# Altium PCB HUT BUI 2.PcbDoc
Units mil, origin at the board's own origin, x right, y up, seen from the top; angles counter-clockwise.
Board outline 6000 x 4000 mil, 2 copper layers (Top Layer, Bottom Layer); 7 components, 7 nets, 19 pads, 0 vias.
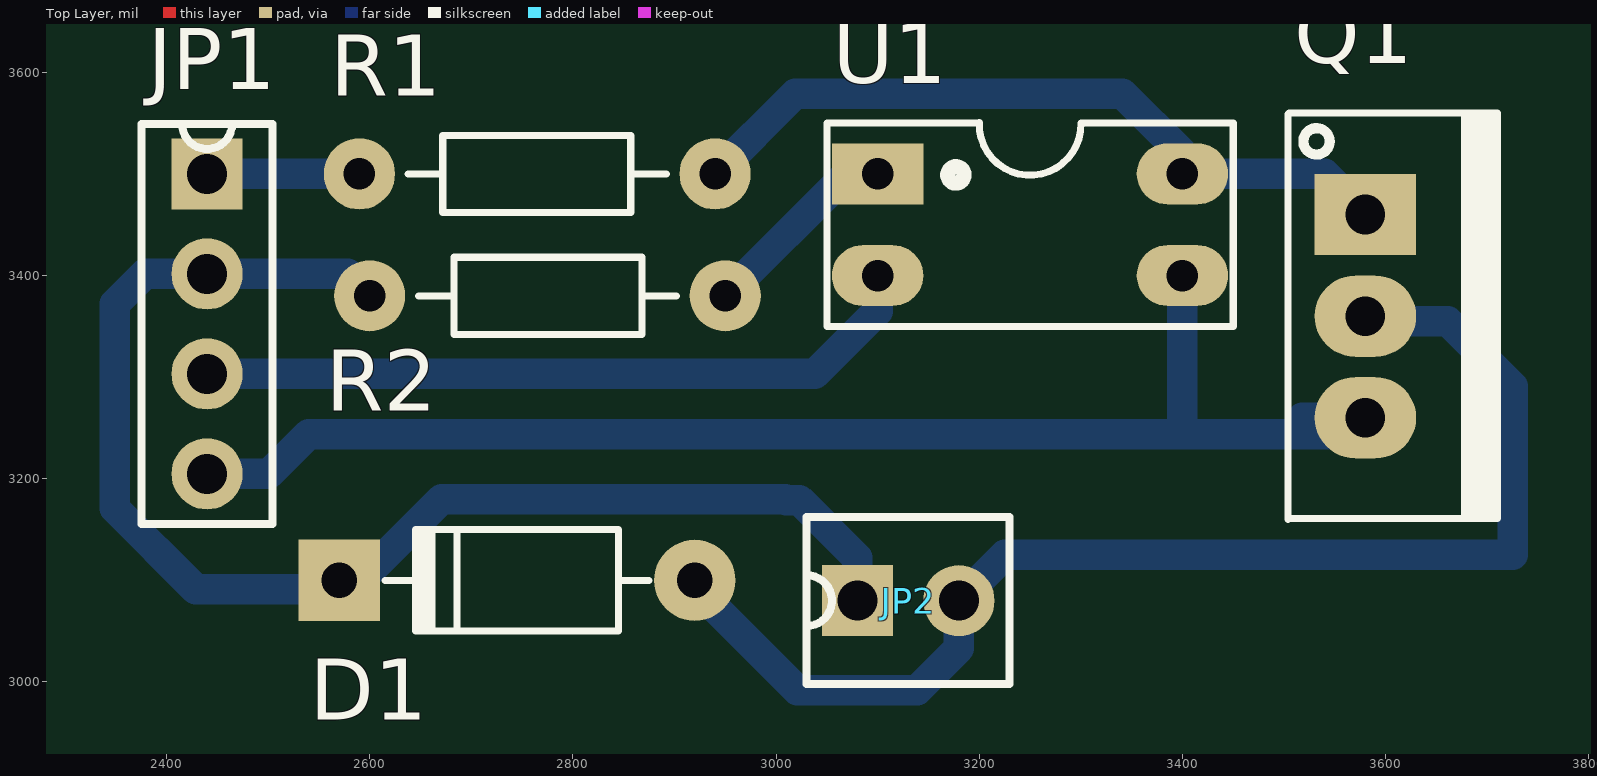
[diagram p0: Top Layer view]
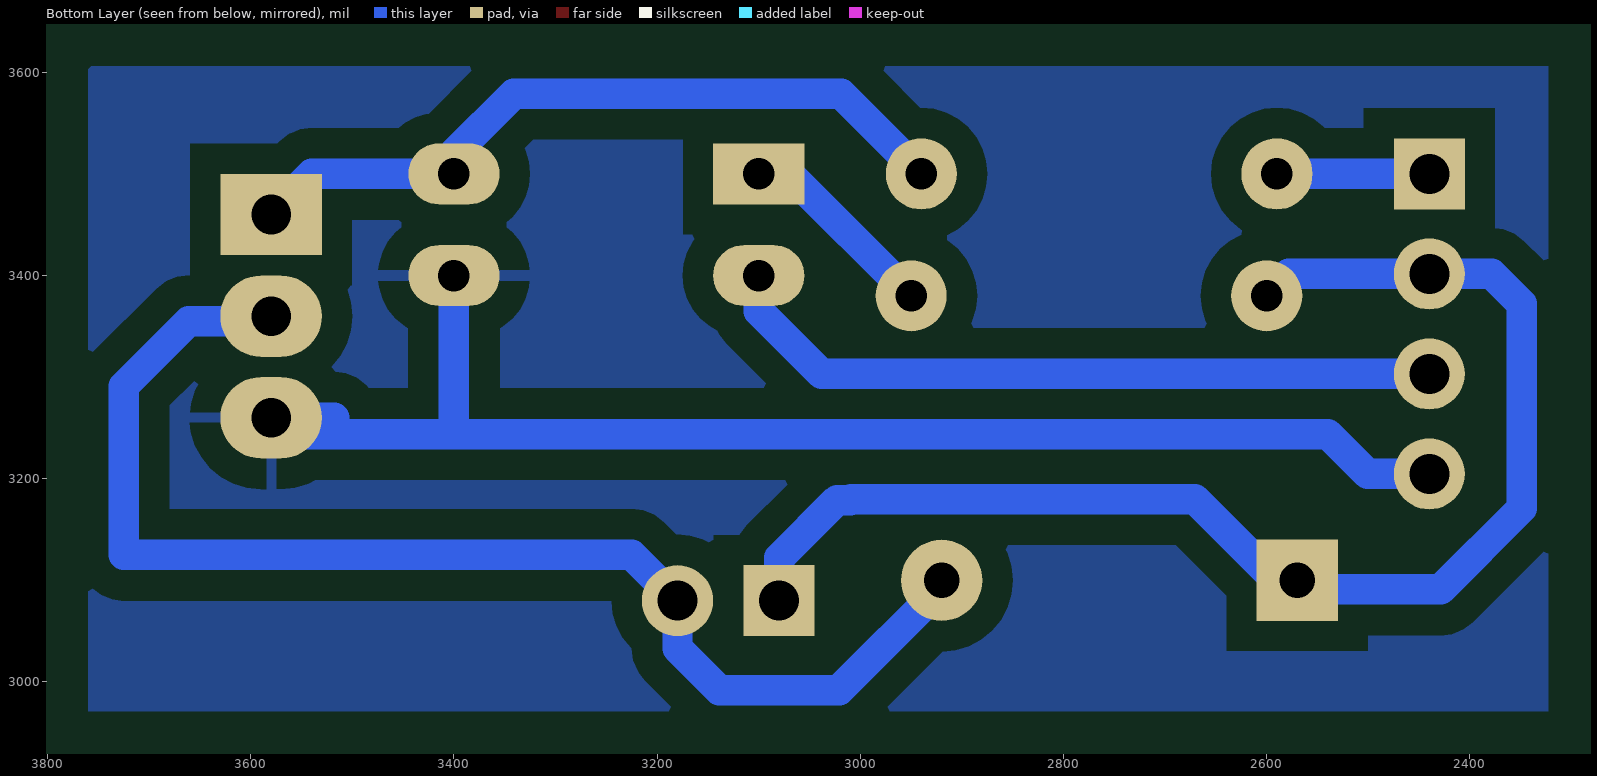
[diagram p1: Bottom Layer view, seen from below]
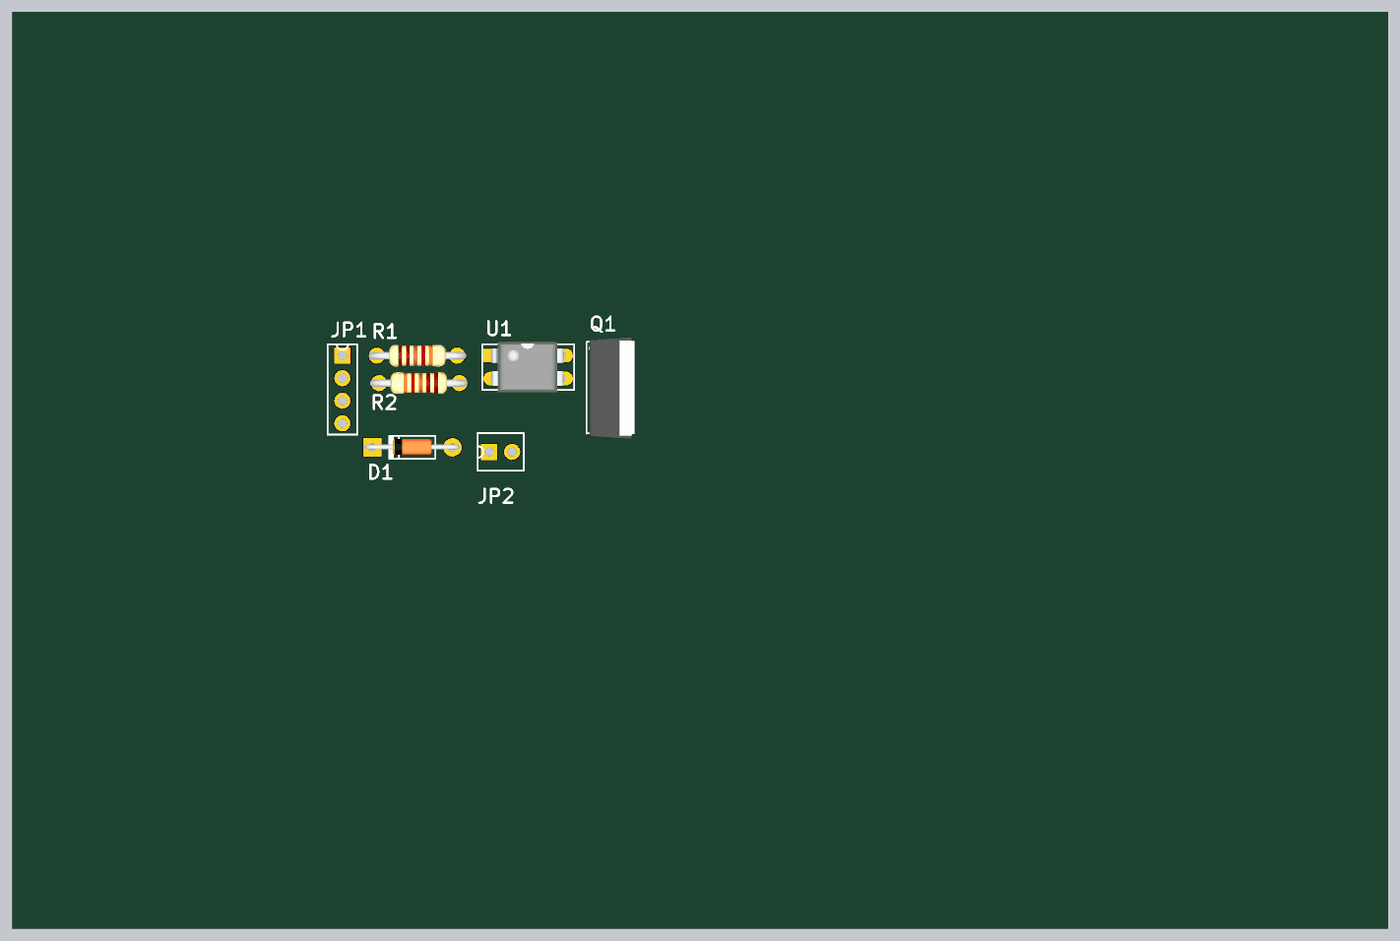
[diagram p2: 3D render of the assembled board from above, using the file's embedded part models]

## Layer stack, top to bottom
Top Layer: signal copper 1.4
Dielectric: dielectric 12.6, FR-4, Dk 4.8
Bottom Layer: signal copper 1.4

## Board outline
1000,1000 7000,1000 7000,5000 1000,5000

## Design rules (kind name [scope] priority, off if disabled: settings)
Clearance [All] p1: gap=30
PolygonConnect [All] p1: connectstyle=Relief reliefconductorwidth=10 reliefentries=4 polygonreliefangle="90 Angle"
RoomDefinition "HUI BUI 2" [InComponentClass('HUI BUI 2')] p1: confinementstyle=ConfineIn formatcopy=TRUE lockcomponents=FALSE outline 7045,1025 8460,1025 8460,1580 7045,1580
RoutingVias [All] p1: holewidth=28 width=50 viastyle="Through Hole" minholewidth=28 minwidth=50 maxholewidth=28 maxwidth=50
SilkscreenOverComponentPads [All] p1: minsilkscreentomaskgap=10
SolderMaskExpansion [All] p1: expansion=4
Width [All] p1: maxlimit=30 minlimit=30 preferedwidth=30
27 further rules are at their usual default settings.

## Components (designator, comment, footprint, x,y, rotation, side; value= is the part's Value field where it differs from the comment)
D1 "1N4007" D1A 2920,3100 r0 top
JP1 "JP4" CON4 2440,3500 r0 top
JP2 "JP2" CON2 3080,3080 r90 top
Q1 "IRF840" QTO-220 3580,3460 r270 top
R1 "10K" R1/4W 2940,3500 r180 top
R2 "220" R1/4W 2600,3380 r0 top
U1 "PC817" DIP4/W0.3 3100,3500 r270 top

## Footprints (in the part's own frame and the unit in brackets; to place one, negate y for a bottom-side part, rotate by r counter-clockwise, add the part's x,y. Pads: shape width x height; smd on the part's side, far side on the other; paste and mask are expansions set on the pad)
CON2 [mil]
  rect 70x70 hole 39.37 unplated: 1(0,0)
  round 70 hole 39.37 unplated: 2(0,-100)
  silkscreen extent -82,-150 82,50
CON4 [mil]
  rect 70x70 hole 39.37 unplated: 1(0,0)
  round 70 hole 39.37 unplated: 2(0,-98.43) 3(0,-196.85) 4(0,-295.28)
  silkscreen extent -64,-344 64,49
D1A [mil] "Diode 1A, W 100mil, L 350mil"
  round 80 hole 35: 1(0,0)
  rect 80x80 hole 35: 2(-350,0)
  silkscreen extent -305,-50 -45,50, body extent -386,-33 34,36, height 84
DIP4/W0.3 [mil] "4 PIN, W 300mil, Pin to pin 100mil"
  rect 60x90 hole 31: 1(0,0)
  oval 60x90 hole 31: 2(100,0) 3(100,300) 4(0,300)
  silkscreen extent -50,-50 150,350, body extent -59,-10 159,305, height 170
QTO-220 [mil] "TO-220 - 1-2-3"
  rect 80x100 hole 39: 1(0,0)
  oval 80x100 hole 39: 2(100,0) 3(200,0)
  silkscreen extent -100,-76 300,130, body extent -119,-64 322,121, height 755
R1/4W [mil] "R 1/4W, 2 Pin, 350mil"
  round 70 hole 31: 1(0,0) 2(350,0)
  silkscreen extent 48,-38 302,38, body extent -40,-47 386,47, height 111

## Part data
D1: library part D1A, "Diode 1A"
JP1: library part Con4, "Connector 4"
JP2: library part Con2, "Connector 2"
Q1: "MOSFET N - CHANNEL 500V - 0.75 - 8A - TO-220"
R1 R2: library part R1/4W, "Resistor 1/4W"
U1: "Single Opto"

## Nets (pads, with @x,y where several pads share a name; then routed paths per layer and width w, separated by ;. In a path a pad name is that pad's centre, name@x,y a point inside that pad or via, vN(x,y) a via of type N, cw(c..) or ccw(c..) an arc to the next point about the centre after c; other vN are vias at no path point)
5V: D1.2 JP1.2 JP2.1 R2.1 | length 1340.2
  Bottom Layer w30: R2.1 2578.43,3401.57 JP1.2 2378.57,3401.57 2349,3372 2349,3171 2429,3091 2561,3091 D1.2 2591,3100 2671,3180 3009,3180 3010,3179 3023,3179 3080,3122 JP2.1
12V: JP1.1 R1.2 | length 150
  Bottom Layer w30: JP1.1 R1.2
GND: JP1.4 Q1.3 U1.3 | length 1403.3
  Bottom Layer w30: JP1.4 2500.72,3204.72 2540,3244 3401,3244 ; U1.3@3400,3378 U1.3 3400,3245 3401,3244 ; 3518,3260 Q1.3 3564,3244 3401,3244
"HUT BUI": JP1.3 U1.2 | length 720.6
  Bottom Layer w30: JP1.3 3038.15,3303.15 3100,3365 U1.2
NetD1_1: D1.1 JP2.2 Q1.2 | length 1283.1
  Bottom Layer w30: D1.1 2920,3093 3021,2992 3139,2992 3180,3033 JP2.2 ; JP2.2@3185,3075 JP2.2 ; Q1.2 3585,3355 3661,3355 3725,3291 3725,3125 3371,3125 3225,3125 JP2.2
NetQ1_1: Q1.1 R1.1 U1.4 | length 733.7
  Bottom Layer w30: R1.1 3019,3579 3341,3579 3400,3520 U1.4 3540,3500 Q1.1
NetR2_2: R2.2 U1.1 | length 199.7
  Bottom Layer w30: R2.2 3070,3500 U1.1

## Polygon pours and split planes (outlines as drawn)
GND on Bottom Layer "Bottom Layer-No Net" (solid): 2323,3606 3757,3606 3760,3603 3760,2971 2323,2971 2323,3606